# EAGLE board plyta_glowna (EAGLE 4.13)
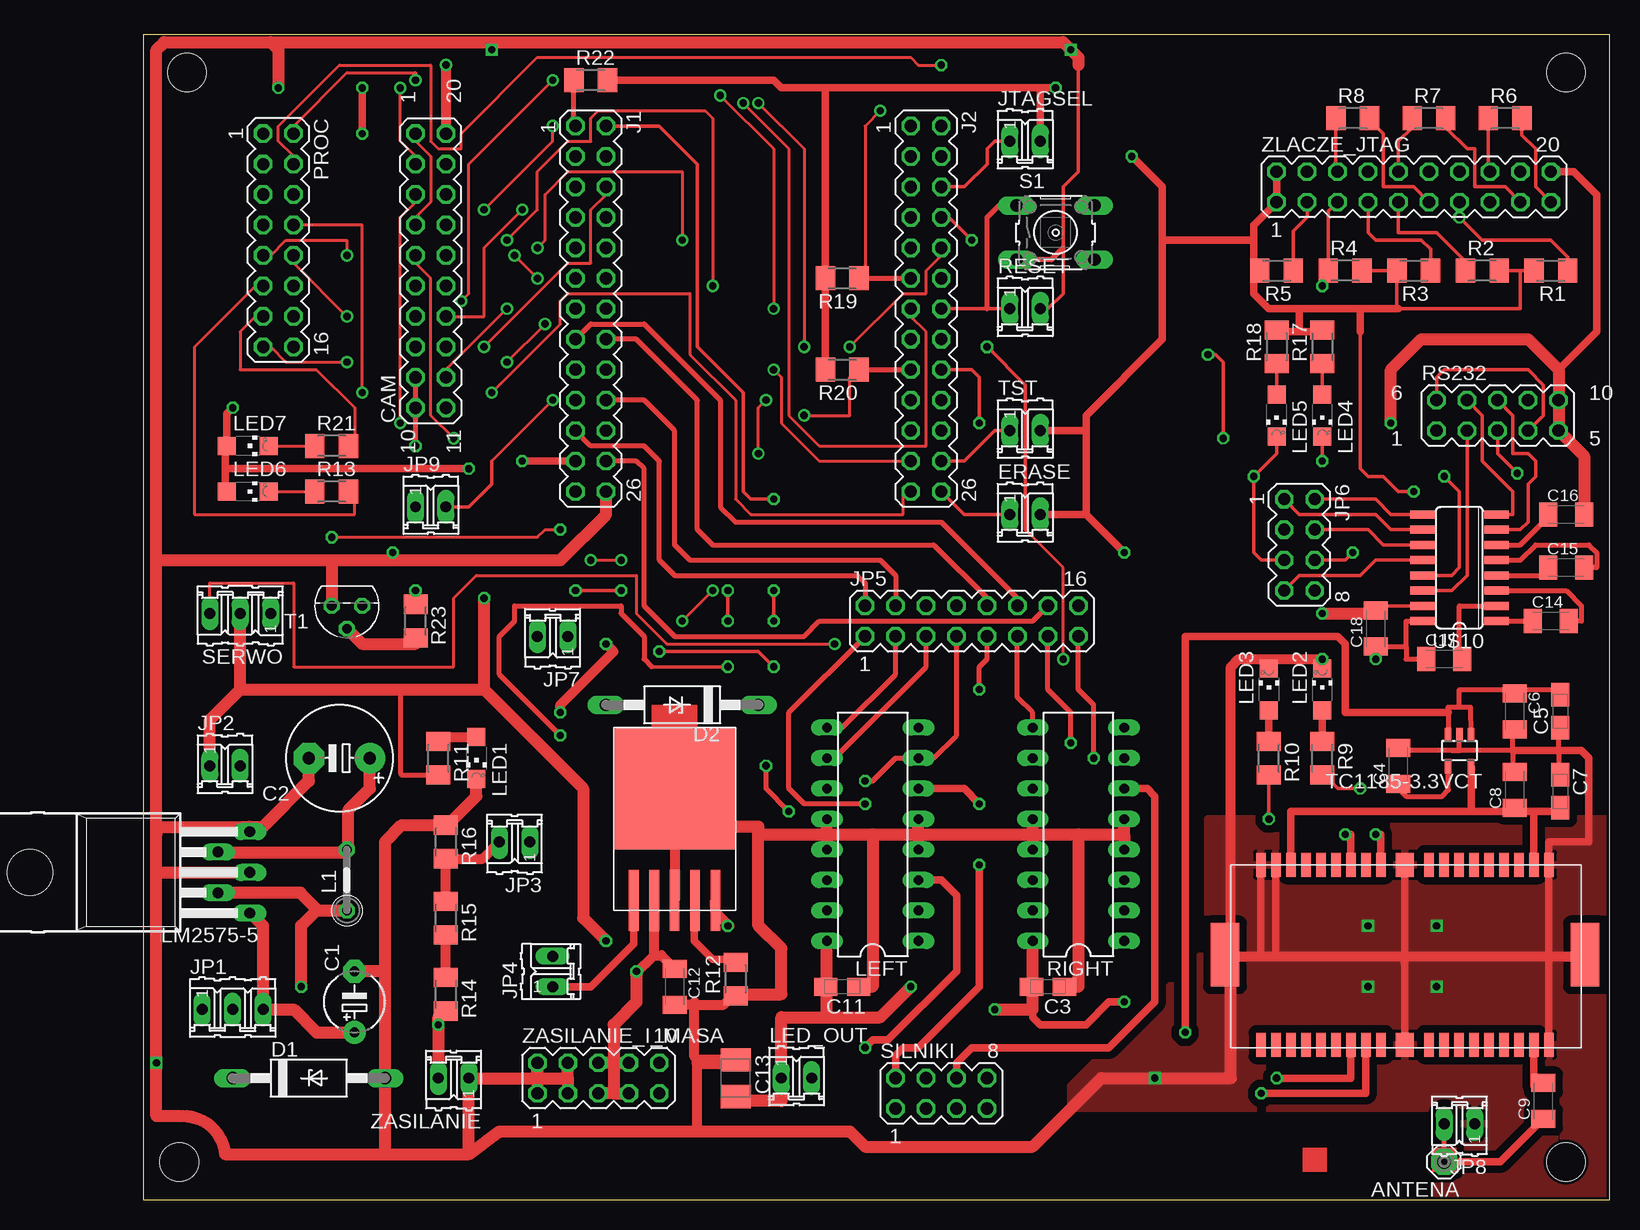
[diagram p0: board, top side]
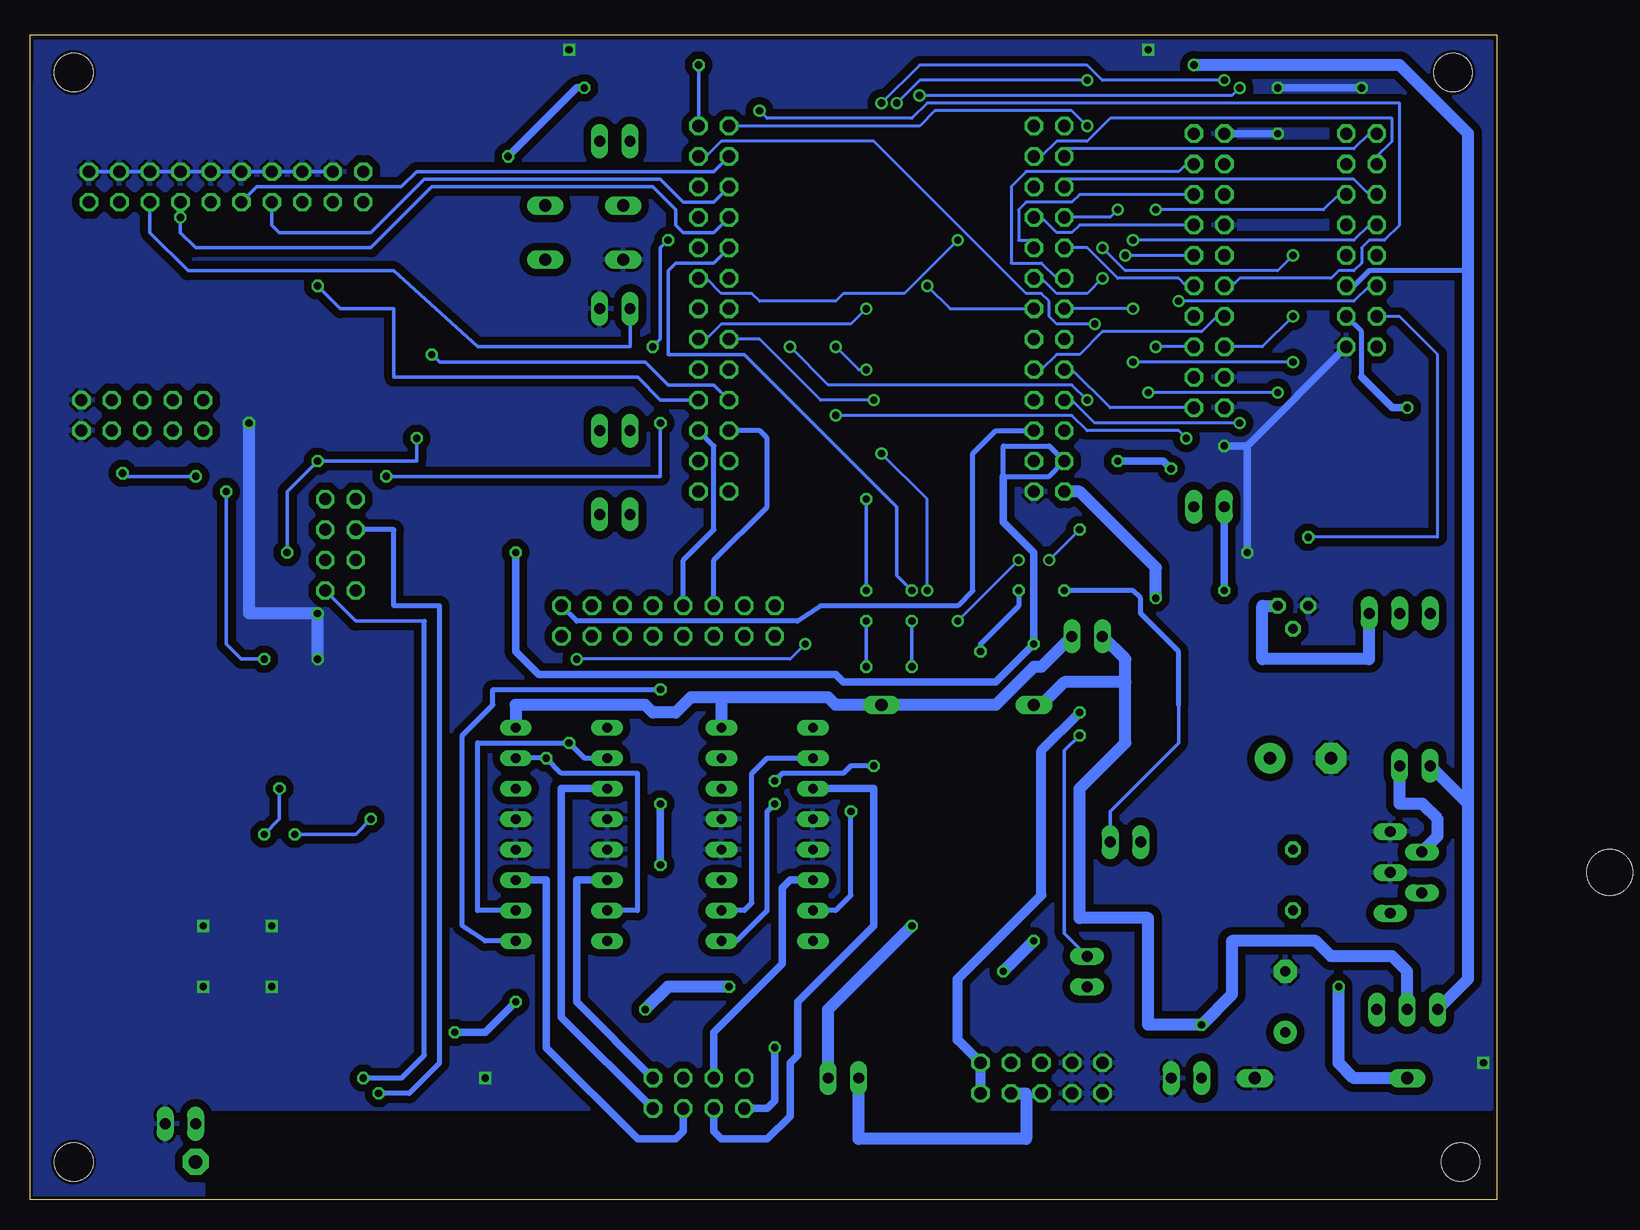
[diagram p1: board, bottom side, seen from below]

Size 122.22 x 97.15 mm. Coordinates in mm from the lower left corner, seen from the top.
Outline: 0,0 122.22,0 122.22,97.15 0,97.15 0,0
Copper layers (1*16): Top 0.035mm / dielectric 1.5mm / Bottom 0.035mm
Design rules "default": minimum track width 10mil, minimum drill 24mil, track to track 25mil, track to pad 25mil, pad to pad 10mil, via to via 10mil, smd to smd 0mil, copper to edge 10mil, drill to drill 8mil, minimum pad ring 10mil, minimum via ring 8mil, stop-mask expansion 4mil, vias tented up to drill 0mil, thermal gap 10mil
Holes 3.2 mm at 3.65,93.98 118.58,93.98 3.01,3.17 118.58,3.17

## Footprints (pad centres in the part's own frame; a part is rotated, then mirrored left to right if it is on the bottom)
SE11 = drill 1.118 pad 2.159 octagon: MP 0,0
E5-5 = drill 0.813 pad 1.905 round: + -2.54,0 | drill 0.813 pad 1.905 octagon: - 2.54,0
E5-8,5 = drill 1.016 pad 2.54 round: + -2.54,0 | drill 1.016 pad 2.54 octagon: - 2.54,0
A/3216-18R = smd 1.95 x 1.5: + 1.375,0; - -1.375,0
C1206K = smd 1.5 x 2: 1 -1.5,0; 2 1.5,0
B/3528-21R = smd 1.95 x 2.5: + 1.525,0; - -1.525,0
MA10-2V2 = drill 1.016 octagon: 1 11.43,1.27; 2 8.89,1.27; 3 6.35,1.27; 4 3.81,1.27; 5 1.27,1.27; 6 -1.27,1.27; 7 -3.81,1.27; 8 -6.35,1.27; 9 -8.89,1.27; 10 -11.43,1.27; 11 -11.43,-1.27; 12 -8.89,-1.27; 13 -6.35,-1.27; 14 -3.81,-1.27; 15 -1.27,-1.27; 16 1.27,-1.27; 17 3.81,-1.27; 18 6.35,-1.27; 19 8.89,-1.27; 20 11.43,-1.27
F126Z12 = drill 1.016 long: A 6.35,0; C -6.35,0
02P = drill 0.914 long: 1 -1.27,0; 2 1.27,0
MA13-2 = drill 1.016 octagon: 1 -15.24,-1.27; 2 -15.24,1.27; 3 -12.7,-1.27; 4 -12.7,1.27; 5 -10.16,-1.27; 6 -10.16,1.27; 7 -7.62,-1.27; 8 -7.62,1.27; 9 -5.08,-1.27; 10 -5.08,1.27; 11 -2.54,-1.27; 12 -2.54,1.27; 13 0,-1.27; 14 0,1.27; 15 2.54,-1.27; 16 2.54,1.27; 17 5.08,-1.27; 18 5.08,1.27; 19 7.62,-1.27; 20 7.62,1.27; 21 10.16,-1.27; 22 10.16,1.27; 23 12.7,-1.27; 24 12.7,1.27; 25 15.24,-1.27; 26 15.24,1.27
03P = drill 0.914 long: 1 -2.54,0; 2 0,0; 3 2.54,0
MA08-2 = drill 1.016 octagon: 1 -8.89,-1.27; 2 -8.89,1.27; 3 -6.35,-1.27; 4 -6.35,1.27; 5 -3.81,-1.27; 6 -3.81,1.27; 7 -1.27,-1.27; 8 -1.27,1.27; 9 1.27,-1.27; 10 1.27,1.27; 11 3.81,-1.27; 12 3.81,1.27; 13 6.35,-1.27; 14 6.35,1.27; 15 8.89,-1.27; 16 8.89,1.27
MA04-2 = drill 1.016 octagon: 1 -3.81,-1.27; 2 -3.81,1.27; 3 -1.27,-1.27; 4 -1.27,1.27; 5 1.27,-1.27; 6 1.27,1.27; 7 3.81,-1.27; 8 3.81,1.27
0207/5V = drill 0.813 octagon: 1 -2.54,0; 2 2.54,0
CHIPLED_1206 = smd 1.5 x 1.5: A 0,-1.75; C 0,1.75
DIL16 = drill 0.813 long: 1 -8.89,-3.81; 2 -6.35,-3.81; 3 -3.81,-3.81; 4 -1.27,-3.81; 5 1.27,-3.81; 6 3.81,-3.81; 7 6.35,-3.81; 8 8.89,-3.81; 9 8.89,3.81; 10 6.35,3.81; 11 3.81,3.81; 12 1.27,3.81; 13 -1.27,3.81; 14 -3.81,3.81; 15 -6.35,3.81; 16 -8.89,3.81
TO220-52 = drill 0.9 long: 1 -3.4,-21.1; 2 -1.7,-18.47; 3 0,-21.1; 4 1.7,-18.47; 5 3.4,-21.1 | hole 3.8: 0,-2.8
M1206 = smd 1.6 x 2: 1 -1.4,0; 2 1.4,0
MA05-2V2 = drill 1.016 octagon: 1 -5.08,-1.27; 2 -2.54,-1.27; 3 0,-1.27; 4 2.54,-1.27; 5 5.08,-1.27; 6 -5.08,1.27; 7 -2.54,1.27; 8 0,1.27; 9 2.54,1.27; 10 5.08,1.27
B3F-10XX = drill 1.016 long: 1 -3.251,2.261; 2 3.251,2.261; 3 -3.251,-2.261; 4 3.251,-2.261
TO92 = drill 0.813 octagon: 1 1.27,0; 2 0,1.905; 3 -1.27,0
SOT23-5 = smd 0.55 x 1.2: 1 -0.95,-1.3; 2 0,-1.3; 3 0.95,-1.3; 4 0.95,1.3; 5 -0.95,1.3
TO265 = smd 10.16 x 10.16: BLASZKA 0,7.62 | smd 0.813 x 5.08: P$1 -3.404,-1.702; P$2 -1.702,-1.702; P$3 0,-1.702; P$4 1.702,-1.702; P$5 3.404,-1.702
SO16 = smd 0.66 x 2.032: 1 -4.445,-3.073; 2 -3.175,-3.073; 3 -1.905,-3.073; 4 -0.635,-3.073; 5 0.635,-3.073; 6 1.905,-3.073; 7 3.175,-3.073; 8 4.445,-3.073; 9 4.445,3.073; 10 3.175,3.073; 11 1.905,3.073; 12 0.635,3.073; 13 -0.635,3.073; 14 -1.905,3.073; 15 -3.175,3.073; 16 -4.445,3.073
BTM222 = smd 0.8 x 2: P$1 -10,0; P$2 -8.75,0; P$3 -7.5,0; P$4 -6.25,0; P$5 -5,0; P$6 -3.75,0; P$7 -2.5,0; P$8 -1.25,0; P$9 0,0; P$11 4,0; P$12 5.25,0; P$13 6.5,0; P$14 7.75,0; P$15 9,0; P$16 10.25,0; P$17 11.5,0; P$18 12.75,0; P$19 14,0; P$20 14,15; P$21 12.75,15; P$22 11.5,15; P$23 10.25,15; P$24 9,15; P$25 7.75,15; P$26 6.5,15; P$27 5.25,15; P$28 4,15; P$30 0,15; P$31 -1.25,15; P$32 -2.5,15; P$33 -3.75,15; P$34 -5,15; P$35 -6.25,15; P$36 -7.5,15; P$37 -8.75,15; P$38 -10,15 | smd 1.5 x 2: P$10 2,0; P$29 2,15 | smd 2.4 x 5.3: P$390 -13,7.5; P$401 17,7.5
MA05-2 = drill 1.016 octagon: 1 -5.08,-1.27; 2 -5.08,1.27; 3 -2.54,-1.27; 4 -2.54,1.27; 5 0,-1.27; 6 0,1.27; 7 2.54,-1.27; 8 2.54,1.27; 9 5.08,-1.27; 10 5.08,1.27
MA10-2 = drill 1.016 octagon: 1 -11.43,-1.27; 2 -11.43,1.27; 3 -8.89,-1.27; 4 -8.89,1.27; 5 -6.35,-1.27; 6 -6.35,1.27; 7 -3.81,-1.27; 8 -3.81,1.27; 9 -1.27,-1.27; 10 -1.27,1.27; 11 1.27,-1.27; 12 1.27,1.27; 13 3.81,-1.27; 14 3.81,1.27; 15 6.35,-1.27; 16 6.35,1.27; 17 8.89,-1.27; 18 8.89,1.27; 19 11.43,-1.27; 20 11.43,1.27

## Placement (x,y rotation side)
ANTENA  SE11  [SE11]  108.42,3.17 180 top
C1  100uF  [E5-5]  17.62,16.5 90 top
C2  330uF  [E5-8,5]  16.34,36.83 180 top
C3  1uF  [A/3216-18R]  75.4,17.77 180 top
C4  450pF  [C1206K]  104.61,36.19 90 top
C5  1uF  [A/3216-18R]  118.1,40.74 90 top
C6  100nF  [C1206K]  114.29,40.74 270 top
C7  1uF  [A/3216-18R]  118.1,34.06 270 top
C8  100nF  [C1206K]  114.29,34.18 90 top
C9  3.3pF  [C1206K]  116.67,8.25 90 top
C11  1uF  [A/3216-18R]  58.26,17.77 180 top
C12  100nF  [C1206K]  44.29,17.77 270 top
C13  100uF  [B/3528-21R]  49.37,10.15 270 top
C14  100nF  [C1206K]  117.31,48.25 0 top
C15  100nF  [C1206K]  118.58,52.7 0 top
C16  100nF  [C1206K]  118.58,57.14 0 top
C17  100nF  [C1206K]  108.42,45.08 0 top
C18  100nF  [C1206K]  102.7,47.62 90 top
CAM  po6030  [MA10-2V2]  23.96,77.47 90 top
D1  1N5819  [F126Z12]  13.8,10.15 0 top
D2  1N5819  [F126Z12]  44.92,41.27 180 top
ERASE  [02P]  73.49,57.14 0 top
J1  [MA13-2]  37.3,74.29 270 top
J2  [MA13-2]  65.24,74.29 270 top
JP1  [03P]  7.46,15.87 0 top
JP2  [02P]  6.82,36.19 0 top
JP3  [02P]  30.95,29.84 180 top
JP4  [02P]  34.12,19.05 90 top
JP5  [MA08-2]  69.05,48.25 0 top
JP6  [MA04-2]  96.35,54.6 270 top
JP7  [02P]  34.12,46.98 180 top
JP8  [02P]  109.69,6.34 180 top
JP9  [02P]  23.96,57.78 0 top
JTAGSEL  [02P]  73.49,88.26 0 top
L1  330uH  [0207/5V]  16.98,26.66 90 top
LED1  [CHIPLED_1206]  27.77,36.83 180 top
LED2  [CHIPLED_1206]  98.26,42.54 0 top
LED3  [CHIPLED_1206]  93.81,42.54 0 top
LED4  [CHIPLED_1206]  98.26,65.4 180 top
LED5  [CHIPLED_1206]  94.45,65.4 180 top
LED6  [CHIPLED_1206]  8.72,59.05 270 top
LED7  [CHIPLED_1206]  8.72,62.86 270 top
LED_OUT  [02P]  54.45,10.15 0 top
LEFT  L293D  [DIL16]  60.8,30.48 90 top
LM2575-5  [TO220-52]  -12.23,27.3 90 top
PROC  [MA08-2]  11.27,80.01 270 top
R1  10k  [M1206]  117.31,77.47 180 top
R2  10k  [M1206]  111.59,77.47 0 top
R3  10k  [M1206]  105.88,77.47 180 top
R4  10k  [M1206]  100.16,77.47 0 top
R5  10k  [M1206]  94.45,77.47 180 top
R6  10k  [M1206]  113.5,90.17 0 top
R7  10k  [M1206]  107.15,90.17 0 top
R8  10k  [M1206]  100.8,90.17 0 top
R9  220  [M1206]  98.26,36.83 270 top
R10  220  [M1206]  93.81,36.83 270 top
R11  512  [M1206]  24.6,36.83 270 top
R12  3,6k  [M1206]  49.37,18.41 90 top
R13  220  [M1206]  15.71,59.05 0 top
R14  2k  [M1206]  25.23,17.14 270 top
R15  2k  [M1206]  25.23,23.49 270 top
R16  2k  [M1206]  25.23,29.84 270 top
R17  220  [M1206]  98.26,71.11 90 top
R18  220  [M1206]  94.45,71.11 90 top
R19  2k  [M1206]  58.26,76.83 180 top
R20  2k  [M1206]  58.26,69.21 180 top
R21  220  [M1206]  15.71,62.86 0 top
R22  100  [M1206]  37.3,93.34 0 top
R23  1k  [M1206]  22.7,48.25 270 top
RESET  [02P]  73.49,74.29 0 top
RIGHT  L293D  [DIL16]  77.94,30.48 90 top
RS232  MA05-2V2  [MA05-2V2]  112.86,65.4 0 top
S1  [B3F-10XX]  76.03,80.64 0 top
SERWO  [03P]  8.09,48.89 180 top
SILNIKI  [MA04-2]  66.51,8.88 0 top
T1  BC337  [TO92]  16.98,49.52 180 top
TC1185-3.3VCT  3.3V  [SOT23-5]  109.69,37.46 180 top
TST  [02P]  73.49,64.13 0 top
U$2  MBI1801  [TO265]  44.29,26.66 0 top
U$10  MAX3232CSE  [SO16]  109.69,52.7 90 top
U$17  BTM222  [BTM222]  107.15,27.94 180 top
ZASILANIE  [02P]  25.87,10.15 180 top
ZASILANIE_I_MASA  [MA05-2]  37.94,10.15 0 top
ZLACZE_JTAG  [MA10-2]  105.88,84.45 0 top

## Library data of the parts
ANTENA = solpad
C1-C9 C11-C18 L1 R1-R23 = rcl
CAM J1 J2 JP5 JP6 PROC RS232 SILNIKI ZASILANIE_I_MASA ZLACZE_JTAG = con-lstb
D1 D2 = diode
ERASE JP1-JP4 JP7-JP9 JTAGSEL LED_OUT RESET SERWO TST ZASILANIE = con-amp-quick
LED1-LED7 = led
LEFT RIGHT = st-microelectronics
LM2575-5 = linear
S1 = switch-omron
T1 = transistor
TC1185-3.3VCT = v-reg-micrel
U$2 = moje_elementy
U$10 = maxim-7a
U$17 = btm_222

## Nets
#RESET: J2.14 RESET.1 S1.1 ZLACZE_JTAG.15
+3V3: C17.1 C18.1 ERASE.2 J1.23 JTAGSEL.2 LED6.A LED7.A PROC.14 R1.2 R2.2 R3.2 R4.2 R5.2 R17.2 R18.2 R19.2 R20.2 R22.2 TST.2 U$10.16 ZASILANIE_I_MASA.9 ZASILANIE_I_MASA.10 ZLACZE_JTAG.1 ZLACZE_JTAG.2
+3V3_BTM: C7.+ C8.1 TC1185-3.3VCT.5 U$17.P$2 U$17.P$17
+5V: C3.+ C5.+ C6.1 C11.+ C12.1 C13.+ CAM.20 J1.25 JP1.1 JP2.1 LED_OUT.1 LEFT.16 PROC.12 R11.2 RIGHT.16 SERWO.2 TC1185-3.3VCT.1 TC1185-3.3VCT.3 U$2.P$2 ZASILANIE_I_MASA.5 ZASILANIE_I_MASA.6 ZASILANIE_I_MASA.7 ZASILANIE_I_MASA.8
AD4: J1.2 JP3.1
AD5: J1.3 PROC.1
AD6: J1.4 PROC.3
AD7: J1.5 PROC.5
ADVREF: J1.1 R22.1
BTM_RX_DATA_INPUT: JP6.8 U$17.P$26
BTM_TX_DATA_OUTPUT: JP6.3 U$17.P$27
CAM_PCLK: CAM.8 PROC.10
CATODE: LED_OUT.2 U$2.P$5
CTS_3V: JP6.2 U$10.9
DF_CS: J2.25 PROC.8
ERASE: ERASE.1 J2.26
GND: C1.- C2.- C3.- C4.2 C5.- C6.2 C7.- C8.2 C11.- C12.2 C13.- C16.2 C18.2 CAM.1 CAM.4 CAM.9 CAM.10 D1.A J1.26 JP8.1 LED1.C LED2.C LED3.C LEFT.4 LEFT.5 LEFT.12 LEFT.13 LM2575-5.3 LM2575-5.5 PROC.16 R6.1 R7.1 R8.1 R12.1 R16.1 RESET.2 RIGHT.4 RIGHT.5 RIGHT.12 RIGHT.13 RS232.5 RS232.10 S1.3 T1.1 TC1185-3.3VCT.2 U$2.P$3 U$10.15 U$17.P$1 U$17.P$10 U$17.P$18 U$17.P$19 U$17.P$29 U$17.P$38 ZASILANIE.1 ZASILANIE_I_MASA.1 ZASILANIE_I_MASA.2 ZASILANIE_I_MASA.3 ZASILANIE_I_MASA.4 ZLACZE_JTAG.4 ZLACZE_JTAG.6 ZLACZE_JTAG.8 ZLACZE_JTAG.10 ZLACZE_JTAG.12 ZLACZE_JTAG.14 ZLACZE_JTAG.16 ZLACZE_JTAG.18 ZLACZE_JTAG.20
IN1: JP5.5 LEFT.2 LEFT.10
IN2: JP5.7 LEFT.7 LEFT.15
IN3: JP5.13 RIGHT.2 RIGHT.10
IN4: JP5.15 RIGHT.7 RIGHT.15
JTAGSEL: J2.6 JTAGSEL.1
LED_EN: JP4.1 U$2.P$1
M1_1: LEFT.3 SILNIKI.1
M1_2: LEFT.6 SILNIKI.2
M2_1: LEFT.11 SILNIKI.3
M2_2: LEFT.14 SILNIKI.4
M3_1: RIGHT.3 SILNIKI.5
M3_2: RIGHT.6 SILNIKI.6
M4_1: RIGHT.11 SILNIKI.7
M4_2: RIGHT.14 SILNIKI.8
N$1: R6.2 ZLACZE_JTAG.19
N$2: R7.2 ZLACZE_JTAG.17
N$3: R8.2 ZLACZE_JTAG.11
N$4: D1.C L1.1 LM2575-5.2
N$5: R5.1 ZLACZE_JTAG.3
N$6: ANTENA.MP C9.1 JP8.2
N$7: LED2.A R9.1
N$8: LED3.A R10.1
N$9: LED1.A R11.1
N$10: LED6.C R13.1
N$11: R9.2 U$17.P$11
N$12: R10.2 U$17.P$13
N$13: LED7.C R21.1
N$14: C9.2 U$17.P$37
N$15: D2.C JP7.1 LEFT.8 RIGHT.8
N$16: JP9.1 R23.1
N$20: R12.2 U$2.P$4
N$22: C1.+ JP1.3 LM2575-5.1
N$23: C2.+ JP2.2 L1.2 LM2575-5.4
N$24: R14.1 R15.2
N$25: C14.2 U$10.3
N$26: C4.1 TC1185-3.3VCT.4
N$27: C14.1 U$10.1
N$28: C15.2 U$10.5
N$29: C15.1 U$10.4
N$30: C16.1 U$10.6
N$31: C17.2 U$10.2
N$32: LED4.A R17.1
N$33: LED5.A R18.1
N$34: R23.2 T1.2
N$36: SERWO.1 T1.3
N$37: RS232.4 RS232.6
PA0: J2.8 SERWO.3
PA1: J2.9 JP4.2
PA2: J2.10 JP9.2
PA3: CAM.6 J2.11 R19.1
PA4: CAM.5 J2.17 R20.1
PA5: J2.18 JP6.5 LED5.C
PA6: J2.19 JP6.6 LED4.C
PA7: J2.21 JP5.6
PA8: J2.22 JP5.8
PA9: J1.24 JP5.14
PA10: J1.22 JP5.16
PA11: J1.21 JP5.2
PA12: J1.20 JP5.4
PA13: J1.16 JP5.10
PA14: J1.15 JP5.12
PA15: J1.14 PROC.7
PA16: CAM.12 J1.13
PA17: CAM.13 J1.6
PA18: CAM.14 J1.7
PA19: CAM.15 J1.9
PA20: CAM.16 J1.12
PA21: CAM.17 J1.8
PA22: CAM.18 J1.10
PA23: CAM.19 J1.11
PA24: CAM.11 J1.17
PA25: CAM.7 J1.18
PA26: CAM.3 J1.19
PA27: CAM.2 J2.16
PA28: J2.15 PROC.13 R21.2
PA29: J2.13 PROC.11 R13.2
PA30: J2.12 PROC.9
PA31: J2.4 PROC.15
PC_CTS: RS232.7 U$10.8
PC_RTS: RS232.8 U$10.7
PC_RX: RS232.3 U$10.13
PC_TX: RS232.2 U$10.14
PWM1: JP5.1 LEFT.1
PWM2: JP5.3 LEFT.9
PWM3: JP5.9 RIGHT.1
PWM4: JP5.11 RIGHT.9
RTS_3V: JP6.1 U$10.10
RXD_3V: JP6.7 U$10.12
TCK: J2.3 R2.1 ZLACZE_JTAG.9
TDI: J2.20 R4.1 ZLACZE_JTAG.5
TDO: J2.7 R1.1 ZLACZE_JTAG.13
TMS: J2.5 R3.1 ZLACZE_JTAG.7
TST: J2.24 TST.1
TXD_3V: JP6.4 U$10.11
UDP_PUP: J2.23 PROC.2
USBDN: J2.2 PROC.4
USBDP: J2.1 PROC.6
VBATT*0.33: JP3.2 R15.1 R16.2
VCC: D2.A JP1.2 JP7.2 R14.2 ZASILANIE.2

## Tracks (layer width: path | path; a pad name or v marks a point on that pad's centre or on a via)
#RESET
  Top 0.305: J2.14 70.32,74.29 RESET.1
  Top 0.406: S1.1 71.31,82.9 70.32,81.91 70.32,74.29
  Bottom 0.305: ZLACZE_JTAG.15 112.23,80.64 109.05,77.47 91.91,77.47 84.92,71.11 72.22,71.11 RESET.1
+3V3  (via drill 0.6)
  Top 0.254: 6.82,62.23 7.46,62.23 LED7.A | 6.82,59.68 7.46,59.68 LED6.A
  Top 0.305: v105.88,59.05 104.61,59.05 103.34,60.32 102.07,60.32 101.44,60.95 101.44,72.39 | 92.55,78.1 93.18,77.47 R5.2 92.55,77.47 | R3.2 104.61,77.47 | R3.2 R4.2 | R3.2 104.48,74.42 104.61,74.29 114.77,74.29 114.77,77.47 | 112.86,77.47 R2.2 114.77,77.47 | 114.77,77.47 R1.2
  Top 0.406: 105.24,46.12 C18.1 v102.7,45.08 | 105.24,46.12 105.24,48.25 U$10.16 107.15,48.25 | 105.24,46.12 105.24,45.08 C17.1 | 94.32,72.39 R18.2 94.58,72.39
  Top 0.61: v76.03,92.7 74.77,92.7 | 74.77,92.7 56.99,92.7 | 56.99,92.7 53.18,92.7 52.54,93.34 R22.2 38.57,93.34 | R20.2 56.86,76.7 56.99,76.83 R19.2 56.86,92.58 56.99,92.7 | 74.77,92.7 JTAGSEL.2 | v81.75,53.97 78.58,57.14 | 78.58,57.14 ERASE.2 | 78.58,57.14 78.58,64.13 | 78.58,64.13 TST.2 | 92.55,77.47 92.55,75.56 93.81,74.29 96.35,74.29 | 92.55,80.01 92.55,78.1 | 92.55,80.01 92.55,81.28 ZLACZE_JTAG.1 ZLACZE_JTAG.2 | 96.35,72.39 94.58,72.39 | 96.35,72.39 98.26,72.39 R17.2 98.39,72.39 | 96.35,74.29 101.44,74.29 | 101.44,74.29 104.61,74.29 | 101.44,74.29 101.44,72.39 | 96.35,74.29 96.35,72.39 | J1.23 v31.59,61.59 | v27.14,60.95 6.82,60.95 | LED6.A 6.82,59.05 6.82,60.95 | 6.82,60.95 6.82,62.86 LED7.A 6.97,65.56 v7.46,66.03 | 84.92,80.01 92.55,80.01 | v82.38,86.99 84.92,84.45 84.92,80.01 | 78.58,64.13 78.58,65.4 84.92,71.75 84.92,80.01
  Top 0.813: v34.76,40.63 34.76,41.27 39.21,45.71 v38.57,46.35
  Bottom 0.305: v105.88,59.05 105.88,46.35 104.61,45.08 v102.7,45.08
  Bottom 0.406: 11.27,68.58 11.27,72.39 PROC.14 | 37.3,60.32 J1.23 37.3,62.86 41.11,62.86 41.11,60.32 37.3,60.32
  Bottom 0.61: v76.03,92.7 76.67,92.7 v82.38,86.99 | v81.75,53.97 81.75,45.71 79.84,43.81 55.08,43.81 54.45,43.17 41.75,43.17 v38.57,46.35 38.57,53.97 41.11,56.51 41.11,60.32 | v31.59,61.59 27.77,61.59 v27.14,60.95 | v7.46,66.03 8.72,66.03 11.27,68.58
  Bottom 0.813: ZASILANIE_I_MASA.9 ZASILANIE_I_MASA.10 44.92,13.33 44.92,18.41 37.94,25.4 37.94,37.46 v34.76,40.63
+3V3_BTM
  Top 0.406: 110.66,36.09 110.64,36.1 TC1185-3.3VCT.5 | 114.13,32.38 114.13,33.17 C8.1 114.29,32.53 114.13,32.38
  Top 0.61: U$17.P$17 95.65,32.38 110.96,32.38 | 110.96,32.38 114.13,32.38 | 114.13,32.38 114.77,32.38 | 110.66,36.09 110.66,32.38 110.96,32.38 | 114.13,32.38 114.29,32.38 C8.1 | 115.9,32.38 U$17.P$2 | 114.13,32.38 115.9,32.38 | C7.+ 118.1,32.38 115.9,32.38
+5V  (via drill 0.6, 0.61)
  Top 0.406: TC1185-3.3VCT.3 108.75,38.76 108.75,40.63 108.75,41.09 109.69,41.09 | TC1185-3.3VCT.1 110.63,38.76 110.6,41.09 109.69,41.09 | C5.+ 117.67,42.54 114.13,42.54 114.13,41.75 C6.1 113.98,42.54 109.69,42.54 109.69,41.09 | R11.2 21.55,35.42 21.43,35.55 21.43,42.54
  Top 0.61: v86.83,13.96 86.83,46.98 99.53,46.98 100.16,46.35 100.16,40.63 108.75,40.63 | v81.75,16.5 80.48,16.5 78.58,14.6 74.77,14.6 74.13,15.23 74.13,15.87
  Top 0.813: 41.11,18.92 40.98,18.79 | v41.11,19.05 41.11,18.92 | 42.58,20.39 U$2.P$2 | 41.11,18.92 42.58,20.39 | 44.31,19.27 44.41,19.17 | 44.31,19.27 C12.1 | 42.58,20.39 43.19,20.39 44.31,19.27 | v25.23,94.61 CAM.20
  Top 1.016: 56.99,17.77 LEFT.16 | 74.13,17.77 RIGHT.16 | 56.99,17.77 C11.+ | 56.99,15.23 56.99,17.77 | 56.99,15.23 53.18,15.23 LED_OUT.1 53.18,8.25 49.37,8.25 C13.+ | 8.09,42.54 5.55,40 JP2.1 | 8.09,42.54 21.43,42.54 28.41,42.54 | 28.41,42.54 36.67,34.28 36.67,23.49 v38.57,21.59 | v41.11,19.05 41.11,16.5 39.21,14.6 39.21,11.43 | 39.21,11.43 ZASILANIE_I_MASA.6 | 39.21,11.43 ZASILANIE_I_MASA.8 | 39.21,8.88 ZASILANIE_I_MASA.7 | 39.21,11.43 39.21,8.88 | 39.21,8.88 ZASILANIE_I_MASA.5 | 56.99,15.23 61.43,15.23 v63.97,17.77 | v70.95,15.87 74.13,15.87 74.13,17.77 | 74.13,17.77 C3.+ | 28.41,42.54 v28.41,50.16 | 8.09,42.54 SERWO.2
  Bottom 0.406: 2.38,77.47 10.63,77.47 11.9,76.2 PROC.12
  Bottom 0.61: v86.83,13.96 84.29,13.96 v81.75,16.5
  Bottom 1.016: JP1.1 2.38,18.41 2.38,33.02 | 2.38,33.02 JP2.1 | v38.57,21.59 v41.11,19.05 | ZASILANIE_I_MASA.7 39.21,8.88 39.21,5.07 53.18,5.07 LED_OUT.1 | v63.97,17.77 69.05,17.77 v70.95,15.87 | J1.25 34.76,59.05 28.41,52.7 v28.41,50.16 | 2.38,33.02 2.38,77.47 2.38,88.9 8.09,94.61 v25.23,94.61
AD4  (via drill 0.6)
  Top 0.305: v36.03,50.79 v39.84,50.79 | v43.02,45.71 51.27,45.71 v52.54,44.45 | v52.54,48.25 v52.54,50.79 | v52.54,58.41 50.64,58.41 50,59.05 50,67.31 46.19,71.11 46.19,86.36 43.02,89.53 J1.2
  Bottom 0.305: JP3.1 32.22,32.38 26.5,38.09 26.5,41.27 | v52.54,44.45 v52.54,48.25 | v52.54,50.79 v52.54,58.41
  Bottom 0.406: 26.5,41.27 26.5,45.71 29.68,48.89 29.68,50.16 30.32,50.79 v36.03,50.79 | v39.84,50.79 39.84,49.52 43.02,46.35 v43.02,45.71
AD5
  Bottom 0.254: PROC.1 10.63,88.9 11.9,87.62 36.03,87.62 J1.3
AD6
  Bottom 0.254: PROC.3 9.99,86.99 8.72,88.26 8.72,90.17 32.22,90.17 34.12,88.26 36.67,88.26 37.94,86.99 J1.4
AD7
  Bottom 0.254: PROC.5 10.63,83.82 11.9,85.09 36.03,85.09 J1.5
ADVREF
  Top 0.406: R22.1 35.9,89.66 J1.1
BTM_RX_DATA_INPUT  (via drill 0.6)
  Top 0.61: U$17.P$26 100.65,10.15 v94.45,10.15
  Bottom 0.305: JP6.8 95.08,48.25 89.37,48.25
  Bottom 0.406: 89.37,48.25 89.37,12.06 91.27,10.15 v94.45,10.15
BTM_TX_DATA_OUTPUT  (via drill 0.6)
  Top 0.61: U$17.P$27 101.9,8.88 v93.18,8.88
  Bottom 0.406: JP6.3 91.91,55.88 91.91,49.52 88.1,49.52 88.1,11.43 90.64,8.88 v93.18,8.88
CAM_PCLK  (via drill 0.61)
  Top 0.254: v16.98,73.66 12.54,78.1 PROC.10
  Bottom 0.254: v16.98,73.66 19.52,71.11 CAM.8
CATODE  (via drill 0.6)
  Top 0.813: 48.83,22.86 48.86,22.83 | v48.73,22.86 48.83,22.86 | U$2.P$5 47.69,24 48.83,22.86
  Bottom 1.016: v48.73,22.86 55.72,15.87 LED_OUT.2
CTS_3V
  Top 0.305: JP6.2 102.7,58.41 103.97,57.14 U$10.9
DF_CS  (via drill 0.61)
  Top 0.254: v18.25,67.31 18.25,81.28 PROC.8 | v29.04,67.31 34.76,73.02 34.76,74.93 35.4,75.56 45.55,75.56 45.55,70.48 49.37,66.67 49.37,58.41 50.64,57.14 63.34,57.14 63.34,59.05 J2.25
  Bottom 0.254: v18.25,67.31 v29.04,67.31
ERASE
  Top 0.305: ERASE.1 68.41,57.14 J2.26
GND  (via drill 0.6)
  Top 0.254: CAM.4 22.7,81.91 23.96,83.18 23.96,86.99 22.7,88.26 CAM.1
  Top 0.305: C18.2 102.94,49.12 103.34,49.52 U$10.15 | R8.1 99.4,85.85 ZLACZE_JTAG.6 | R7.1 105.75,89.4 104.61,88.26 ZLACZE_JTAG.10 | R6.1 112.1,85.85 ZLACZE_JTAG.16 | RESET.2 75.4,74.29 76.67,75.56 76.67,79.37 76.67,84.45 77.94,85.72 77.94,94.61
  Top 0.406: TC1185-3.3VCT.2 109.69,37.46 109.05,37.46 | 114.13,37.46 109.05,37.46 | C6.2 114.16,38.73 114.13,38.73 114.13,37.46 | C8.2 114.16,36.19 114.13,36.19 114.13,37.46 | 117.94,37.46 117.94,38.73 118.09,38.73 C5.- 117.94,38.57 117.94,37.46 | C7.- 117.97,36.19 117.94,36.19 117.94,37.46 | C4.2 104.61,38.09 105.24,37.46 109.05,37.46 | LED2.C 98.26,43.81 | v22.7,62.86 CAM.10 CAM.9 | S1.3 75.68,78.38 76.67,79.37
  Top 0.61: 94.36,20.41 94.45,20.31 94.4,20.31 U$17.P$18 | 93.11,20.38 93.18,20.31 93.15,20.31 U$17.P$19 | 117.31,20.31 117.11,20.12 | 105.11,19.68 105.11,20.18 105.24,20.31 105.15,20.31 | 117.31,20.31 117.11,20.52 | 114.13,37.46 117.94,37.46 119.85,37.46 120.48,36.83 120.48,29.84 117.15,29.84 U$17.P$1 117.15,20.31 | 105.15,20.31 U$17.P$10 | 105.15,20.31 U$17.P$29 | 117.15,20.31 U$17.P$38 | 117.31,20.31 117.15,20.31 | v18.25,92.7 v18.25,88.9 | 117.94,69.21 121.12,72.39 121.12,83.82 119.21,85.72 ZLACZE_JTAG.20 | 20.79,53.34 v20.79,53.97
  Top 0.813: R12.1 49.37,17.27 48.37,16.27 45.94,16.27 | 45.94,16.27 C12.2 | 46.32,5.71 46.32,5.84 46.19,5.96 46.19,11.43 | C13.- 46.19,11.68 45.94,11.93 45.94,16.27 | 45.94,16.27 45.94,16.5 | 90.64,20.31 93.18,20.31 94.45,20.31 105.24,20.31 117.31,20.31 119.21,20.31 | LED2.C v98.26,45.08 93.81,45.08 | 93.81,45.08 LED3.C | 93.81,45.08 91.27,45.08 90.64,44.45 90.64,19.68 | 44.29,31.11 U$2.P$3
  Top 1.016: 20.16,3.8 27.14,3.8 | 27.14,3.8 ZASILANIE.1 32.86,10.15 | 20.16,3.8 D1.A 20.16,19.05 | 20.16,19.05 C1.- | 8.87,31.11 LM2575-5.5 | 8.87,31.11 1.1,31.11 1.1,30.48 | 9.36,27.3 LM2575-5.3 1.1,27.3 | 1.1,27.3 1.1,30.48 | 1.1,27.3 1.1,6.98 3.01,6.98 arc-90 6.82,3.8 20.16,3.8 | 8.87,31.11 9.99,31.11 13.8,34.92 C2.- | LED1.C 27.77,33.65 25.23,31.11 R16.1 21.55,31.24 20.16,29.84 20.16,19.05 | ZASILANIE_I_MASA.1 ZASILANIE_I_MASA.2 32.86,10.15 | 32.86,10.15 35.4,10.15 | 35.4,10.15 ZASILANIE_I_MASA.3 | 35.4,10.15 ZASILANIE_I_MASA.4 | C13.- 49.37,11.43 46.19,11.43 | R12.1 49.37,17.14 53.18,17.14 53.18,20.95 51.27,22.86 51.27,31.11 | 51.27,31.11 44.29,31.11 | 51.27,31.11 51.27,30.48 56.99,30.48 | 56.99,30.48 LEFT.12 | 56.99,30.48 LEFT.13 | 64.61,30.48 LEFT.4 | 56.99,30.48 60.8,30.48 | 60.8,30.48 64.61,30.48 | 64.61,30.48 LEFT.5 | 74.13,30.48 RIGHT.12 | 64.61,30.48 74.13,30.48 | 74.13,30.48 RIGHT.13 | 81.75,30.48 RIGHT.5 | 74.13,30.48 77.94,30.48 | 77.94,30.48 81.75,30.48 | 81.75,30.48 RIGHT.4 | C11.- 60.8,17.77 60.8,30.48 | C3.- 77.94,17.77 77.94,30.48 | 27.14,3.8 29.68,5.71 46.32,5.71 58.89,5.71 60.16,4.44 74.13,4.44 79.84,10.15 v84.29,10.15 90.64,10.15 90.64,19.68 90.64,20.31 | 1.1,30.48 1.1,53.34 | J1.26 38.57,57.14 34.76,53.34 20.79,53.34 15.71,53.34 | 1.1,53.34 15.71,53.34 | 1.1,53.34 1.1,95.88 1.74,96.52 | 119.85,57.14 C16.2 120.08,61.99 RS232.5 RS232.10 117.94,69.21 115.41,71.75 106.52,71.75 103.97,69.21 v103.97,64.77 | C18.2 102.7,48.89 v98.26,48.89 | 15.71,53.34 T1.1 | 77.94,94.61 77.94,95.25 v77.3,95.88 76.67,96.52 1.74,96.52 | v11.27,92.7 11.27,95.88 10.63,96.52 1.74,96.52
  Bottom 0.305: ZLACZE_JTAG.4 ZLACZE_JTAG.6 ZLACZE_JTAG.8 ZLACZE_JTAG.10 ZLACZE_JTAG.12 ZLACZE_JTAG.14 ZLACZE_JTAG.16 ZLACZE_JTAG.18 ZLACZE_JTAG.20
  Bottom 0.61: v11.27,92.7 v18.25,92.7 | v18.25,88.9 CAM.1 | v20.79,53.97 20.79,62.86 | 20.79,62.86 v22.7,62.86 | 20.79,62.86 PROC.16
  Bottom 1.016: v98.26,45.08 v98.26,48.89 103.97,48.89 v103.97,64.77
  other vias: 29.04,95.88 1.1,11.43 102.07,22.86 107.78,22.86 102.07,17.77 107.78,17.77
  pour Top: 88.73,31.74 88.73,20.95 77.3,9.52 77.3,7.62 107.78,7.62 107.78,-0.01 122.39,-0.01 122.39,31.74
  pour Bottom: 0.47,96.52 121.75,96.52 122.39,-0.01 107.78,-0.01 107.78,7.62 0.47,7.62
IN1
  Top 0.406: LEFT.10 57.62,36.83 65.24,44.45 JP5.5
  Bottom 0.406: LEFT.2 62.7,24.12 62.07,24.76 62.07,35.55 60.8,36.83 LEFT.10
IN2  (via drill 0.6)
  Top 0.406: v53.81,32.38 51.91,34.28 v51.91,36.19 | v60.16,34.92 60.8,34.92 62.7,36.83 LEFT.7 65.88,36.83 67.78,38.73 JP5.7
  Bottom 0.406: LEFT.15 55.08,24.12 53.81,25.4 v53.81,32.38 | v51.91,36.19 53.81,36.19 54.45,35.55 59.53,35.55 v60.16,34.92
IN3  (via drill 0.6)
  Top 0.406: v77.3,38.09 77.3,40.63 75.4,42.54 JP5.13
  Bottom 0.406: RIGHT.2 84.92,24.12 84.92,38.09 v77.3,38.09 76.03,36.83 RIGHT.10
IN4  (via drill 0.6)
  Top 0.406: v79.21,36.83 79.21,41.27 77.94,42.54 JP5.15
  Bottom 0.406: RIGHT.15 71.59,24.12 71.59,35.55 77.94,35.55 v79.21,36.83 RIGHT.7
JTAGSEL
  Top 0.305: JTAGSEL.1 70.95,88.26 70.32,87.62 70.32,86.36 68.41,84.45 J2.6
LED_EN
  Top 0.61: U$2.P$1 40.88,21.36 37.3,17.77 JP4.1
M1_1  (via drill 0.6)
  Top 0.61: v60.16,12.7 60.8,13.33 62.07,13.33 67.78,19.05 67.78,25.4 66.51,26.66 LEFT.3
  Bottom 0.61: SILNIKI.1 60.8,7.62 60.16,8.25 v60.16,12.7
M1_2  (via drill 0.6)
  Top 0.61: SILNIKI.2 62.7,12.06 63.34,12.7 64.61,12.7 69.69,17.77 v69.69,27.94 | v69.69,33.02 68.41,34.28 LEFT.6
  Bottom 0.61: v69.69,27.94 v69.69,33.02
M2_1
  Bottom 0.61: SILNIKI.3 65.24,5.71 64.61,5.07 60.8,5.07 58.89,6.98 58.89,11.43 58.26,12.06 58.26,16.5 51.91,22.86 51.91,34.28 LEFT.11
M2_2
  Bottom 0.61: SILNIKI.4 65.24,13.96 59.53,19.68 59.53,26.03 58.89,26.66 LEFT.14
M3_1
  Bottom 0.61: SILNIKI.5 67.78,5.71 68.41,5.07 71.59,5.07 79.21,12.7 79.21,26.66 RIGHT.3
M3_2
  Top 0.61: SILNIKI.6 67.78,11.43 69.05,12.7 80.48,12.7 84.29,16.5 84.29,33.65 83.66,34.28 RIGHT.6
M4_1
  Bottom 0.61: SILNIKI.7 77.94,15.23 77.94,34.28 RIGHT.11
M4_2
  Bottom 0.61: SILNIKI.8 76.67,16.5 76.67,26.66 RIGHT.14
N$1
  Top 0.305: R6.2 114.9,88.77 116.04,87.62 116.04,84.45 ZLACZE_JTAG.19
N$2
  Top 0.305: R7.2 108.55,89.4 110.33,87.62 110.96,87.62 110.96,84.45 113.5,84.45 ZLACZE_JTAG.17
N$3
  Top 0.305: R8.2 102.2,90.04 103.34,88.9 103.34,84.45 105.88,84.45 ZLACZE_JTAG.11
N$4  (via drill 0.6)
  Top 1.016: LM2575-5.2 13.09,25.6 14.5,24.19 | 14.5,24.19 14.57,24.12 L1.1 | v13.17,17.77 13.17,22.86 14.5,24.19
  Bottom 1.016: D1.C 11.9,10.15 13.17,11.43 v13.17,17.77
N$5
  Top 0.305: R5.1 95.85,80.77 96.99,81.91 ZLACZE_JTAG.3
N$6
  Top 0.406: ANTENA.MP JP8.2
  Top 0.61: C9.1 113.09,3.17 ANTENA.MP
N$7
  Top 0.61: R9.1 LED2.A
N$8
  Top 0.61: R10.1 LED3.A
N$9
  Top 0.813: R11.1 24.6,38.09 25.08,38.58 LED1.A
N$10
  Top 0.254: LED6.C R13.1
N$11  (via drill 0.6)
  Top 0.305: R9.2 98.26,35.55 99.53,34.28 v101.44,34.28
  Top 0.61: U$17.P$11 103.15,30.48 v102.7,30.48
  Bottom 0.305: v102.7,30.48 101.44,31.74 v101.44,34.28
N$12  (via drill 0.6)
  Top 0.305: 93.81,35.55 R10.2 v93.81,31.74
  Top 0.61: U$17.P$13 100.65,30.48 v100.16,30.48
  Bottom 0.305: v100.16,30.48 95.08,30.48 v93.81,31.74
N$13
  Top 0.254: LED7.C R21.1
N$14
  Top 0.61: 116.04,10.15 116.67,10.15 C9.2 116.67,9.52 115.9,9.52 U$17.P$37
N$15
  Bottom 1.016: 64.61,41.91 55.72,41.91 55.08,41.27 D2.C 41.75,41.27 38.57,44.45 37.94,44.45 JP7.1 | 64.61,41.91 LEFT.8 | RIGHT.8 81.75,41.27 70.95,41.27 70.32,40.63 68.41,40.63 67.14,41.91 64.61,41.91
N$16  (via drill 0.6)
  Top 0.61: R23.1 v22.7,50.79
  Bottom 0.61: v22.7,50.79 JP9.1
N$20
  Top 0.61: U$2.P$4 45.94,24.96 45.94,21.59 47.46,20.06 49.49,20.06 49.49,19.94 R12.2
N$22
  Top 1.016: C1.+ 14.44,13.96 12.54,15.87 JP1.3 9.99,22.86 8.87,23.98 | 8.87,23.98 8.72,24.12 | 8.87,23.98 LM2575-5.1
N$23
  Top 1.016: LM2575-5.4 6.24,28.95 16.6,28.95 16.98,29.33 | 16.98,29.33 17.11,29.46 17.11,32.51 18.89,34.28 C2.+ | 16.98,29.33 L1.2
  Bottom 1.016: LM2575-5.4 4.92,30.33 4.92,31.74 6.19,33.02 8.09,33.02 JP2.2
N$24
  Top 0.813: 25.23,18.41 R14.1 R15.2
N$25
  Top 0.406: U$10.3 118.58,50.79 119.85,49.52 119.85,48.25 C14.2 118.58,48.25
N$26
  Top 0.406: C4.1 104.61,34.28 105.24,33.65 108.27,33.65 108.78,34.16 108.78,35.96 108.72,36.01 108.74,36.03 TC1185-3.3VCT.4
N$27
  Top 0.406: 116.04,48.25 C14.1 U$10.1
N$28
  Top 0.406: U$10.5 114.77,53.34 116.04,54.6 120.48,54.6 121.12,53.97 121.12,52.7 C15.2 119.85,52.7
N$29
  Top 0.406: C15.1 117.31,52.7 116.67,52.06 U$10.4
N$30
  Top 0.406: C16.1 117.08,56.91 114.77,54.6 U$10.6
N$31
  Top 0.406: 113.5,49.52 U$10.2 109.69,49.52 109.69,45.08 C17.2
N$32
  Top 0.305: 98.26,69.84 R17.1 LED4.A
N$33
  Top 0.305: 94.45,69.84 R18.1 LED5.A
N$34
  Top 0.254: R23.2 22.06,46.98
  Top 1.016: R23.2 22.7,46.35 18.25,46.35 T1.2
N$36
  Bottom 1.016: SERWO.1 10.63,45.08 19.52,45.08 19.52,49.52 T1.3
N$37
  Top 0.305: 112.86,69.21 108.42,69.21 107.78,68.58 RS232.6 | 112.86,69.21 113.5,69.21 | RS232.4 116.67,65.4 116.67,67.94 115.41,69.21 112.86,69.21
PA0  (via drill 0.6, 0.61)
  Top 0.254: v57.62,46.35 43.65,46.35 41.11,48.89 41.11,52.06 27.77,52.06 25.87,50.16 25.87,44.45 12.54,44.45 12.54,51.43 5.55,51.43 SERWO.3 | v76.67,45.08 76.67,52.7 73.49,55.88 | 67.14,81.91 J2.8
  Top 0.305: v69.05,80.01 67.14,81.91 | v70.32,71.11 73.49,67.94 73.49,55.88
  Bottom 0.254: v57.62,46.35 58.89,45.08 v76.67,45.08
  Bottom 0.305: v69.05,80.01 69.69,79.37 69.69,71.75 v70.32,71.11
PA1  (via drill 0.6)
  Top 0.305: 42.38,44.45 v48.73,44.45 | v48.73,48.25 v48.73,50.79
  Top 0.406: v34.76,38.73 29.68,43.81 29.68,46.98 30.95,48.25 30.95,49.52 39.84,49.52 39.84,48.89 41.75,46.98 41.75,45.08 42.38,44.45
  Bottom 0.305: JP4.2 36.03,22.22 36.03,37.46 v34.76,38.73 | v48.73,44.45 v48.73,48.25 | J2.9 65.24,78.1 68.41,78.1 69.05,77.47 69.05,70.48 62.7,70.48 50,57.78 50,52.06 v48.73,50.79
PA2  (via drill 0.61)
  Top 0.254: 29.04,61.59 v34.12,66.67 | v58.89,71.11 63.34,75.56 65.24,75.56 65.24,77.47 66.51,78.73 J2.10
  Top 0.305: JP9.2 27.14,57.78 29.04,59.68 29.04,61.59
  Bottom 0.254: v34.12,66.67 35.4,67.94 55.72,67.94 v58.89,71.11
PA3  (via drill 0.61)
  Top 0.254: v61.43,90.8 60.16,89.53 60.16,77.47 R19.1
  Top 0.406: R19.1 J2.11
  Bottom 0.254: v61.43,90.8 60.8,90.17 48.73,90.17 47.46,91.44 8.09,91.44 8.09,81.28 9.36,80.01 10.63,80.01 11.27,79.37 11.27,78.1 11.9,77.47 13.17,77.47 13.8,76.83 21.43,76.83 22.06,76.2 CAM.6
PA4  (via drill 0.61)
  Top 0.254: v25.87,63.49 23.96,65.4 23.96,76.83 22.7,78.1 CAM.5 | v55.08,65.4 58.89,65.4 58.89,68.58 R20.1
  Top 0.406: R20.1 J2.17
  Bottom 0.254: v25.87,63.49 26.5,64.13 34.12,64.13 35.4,65.4 v55.08,65.4
PA5  (via drill 0.6)
  Top 0.305: JP6.5 93.18,53.34 92.55,53.97 v92.55,60.32 94.45,62.23 LED5.C 94.45,64.13 | v69.69,64.77 69.69,68.58 69.05,69.21 J2.18
  Bottom 0.305: v92.55,60.32 69.69,60.32 v69.69,64.77
PA6  (via drill 0.6)
  Top 0.305: JP6.6 100.16,53.34 v100.8,53.97 | v98.26,61.59 LED4.C | v88.73,70.48 89.37,70.48 90,69.84 v90,63.49
  Bottom 0.305: v100.8,53.97 100.8,59.05 v98.26,61.59 90,61.59 v90,63.49 | J2.19 65.24,67.94 69.05,67.94 70.95,69.84 88.1,69.84 v88.73,70.48
PA7
  Bottom 0.406: JP5.6 65.24,53.34 60.8,57.78 60.8,63.49 61.43,64.13 J2.21
PA8
  Bottom 0.406: JP5.8 67.78,53.34 65.24,55.88 65.24,62.86 J2.22
PA9
  Top 0.406: JP5.14 74.13,48.25 56.35,48.25 55.08,46.98 44.29,46.98 41.75,49.52 41.75,60.95 41.11,61.59 J1.24
PA10
  Bottom 0.406: JP5.16 76.67,48.25 58.26,48.25 56.35,49.52 44.92,49.52 43.65,50.79 43.65,62.23 41.75,64.13 J1.22
PA11
  Top 0.406: JP5.2 60.16,51.43 59.53,52.06 44.29,52.06 43.02,53.34 43.02,61.59 41.75,62.86 37.3,62.86 J1.21
PA12
  Top 0.406: JP5.4 62.7,52.06 61.43,53.34 45.55,53.34 44.29,54.6 44.29,64.13 41.75,66.67 J1.20
PA13
  Top 0.406: JP5.10 70.32,50.16 65.88,54.6 47.46,54.6 46.19,55.88 46.19,66.67 41.11,71.75 J1.16
PA14
  Top 0.406: JP5.12 72.86,50.16 66.51,56.51 49.37,56.51 48.1,57.78 48.1,66.67 41.75,73.02 37.3,73.02 J1.15
PA15  (via drill 0.61)
  Top 0.254: v30.32,80.01 32.86,82.55 32.86,85.72 35.4,88.26 37.3,88.26 37.3,90.17 37.94,90.8 46.83,90.8 47.46,90.17 v47.46,76.2
  Bottom 0.254: v30.32,80.01 11.9,80.01 10.63,81.28 PROC.7 | v47.46,76.2 45.55,74.29 J1.14
PA16  (via drill 0.61)
  Top 0.254: v30.32,74.29 25.23,69.21 CAM.12
  Bottom 0.254: v30.32,74.29 J1.13
PA17  (via drill 0.61)
  Top 0.254: v28.41,71.11 35.4,78.1 37.3,78.1 37.3,82.55 38.57,83.82 J1.6
  Bottom 0.254: CAM.13 v28.41,71.11
PA18  (via drill 0.61)
  Top 0.254: v31.59,82.55 28.41,79.37 28.41,73.66 CAM.14
  Bottom 0.254: v31.59,82.55 32.22,81.91 J1.7
PA19
  Bottom 0.254: CAM.15 25.87,76.2 26.5,76.83 31.59,76.83 34.12,79.37 J1.9
PA20  (via drill 0.61)
  Top 0.254: v30.95,78.73 v32.86,76.83
  Bottom 0.254: v32.86,76.83 34.12,75.56 36.67,75.56 37.94,76.83 J1.12 | CAM.16 v30.95,78.73
PA21
  Bottom 0.254: CAM.17 34.76,81.28 35.4,80.64 36.67,80.64 37.94,81.91 J1.8
PA22
  Bottom 0.254: CAM.18 34.76,83.82 35.4,83.18 39.21,83.18 39.84,82.55 39.84,80.01 38.57,80.01 J1.10
PA23
  Bottom 0.254: CAM.19 25.87,86.36 26.5,85.72 39.21,85.72 40.48,84.45 40.48,78.1 37.94,78.1 36.67,76.83 J1.11
PA24
  Bottom 0.254: CAM.11 32.22,66.03 35.4,69.21 J1.17
PA25
  Bottom 0.254: CAM.7 23.33,73.66 24.6,72.39 32.86,72.39 34.76,70.48 36.67,70.48 37.94,69.21 J1.18
PA26  (via drill 0.61)
  Top 0.254: v21.43,64.77 21.43,81.91 22.7,83.18 CAM.3
  Bottom 0.254: v21.43,64.77 33.49,64.77 35.4,66.67 J1.19
PA27  (via drill 0.61)
  Top 0.254: v21.43,92.7 21.43,88.26 22.7,86.99 CAM.2 | v48.1,92.07 52.54,87.62 v52.54,74.29
  Bottom 0.254: v21.43,92.7 22.06,92.07 v48.1,92.07 | v52.54,74.29 53.81,73.02 64.61,73.02 65.88,71.75 J2.16
PA28  (via drill 0.6, 0.61)
  Top 0.254: PROC.13 9.36,73.66 8.09,72.39 8.09,69.21 14.44,69.21 17.62,66.03 17.62,63.49 16.98,62.86 R21.2 | v51.91,66.67 51.27,66.03 v51.27,62.23 | v44.92,48.25 v47.46,50.79 | v37.3,53.34 v39.84,53.34 | v15.71,55.24 32.86,55.24 33.49,55.88 v34.76,55.88
  Bottom 0.254: v51.91,66.67 56.35,66.67 61.43,71.75 J2.15 | v51.27,62.23 47.46,58.41 v47.46,50.79 | v39.84,53.34 v44.92,48.25 | PROC.13 8.09,73.66 4.92,70.48 4.92,55.24 v15.71,55.24 | v34.76,55.88 v37.3,53.34
PA29  (via drill 0.61)
  Top 0.254: v26.5,74.93 27.14,75.56 27.14,86.36 v34.12,93.34 | v50,91.44 53.81,87.62 53.81,65.4 56.35,62.86 65.24,62.86 65.24,72.39 63.97,73.66 J2.13 | PROC.11 9.36,76.2 4.28,71.11 4.28,57.14 17.62,57.14 17.62,58.41 16.98,59.05 R13.2
  Bottom 0.254: v26.5,74.93 11.9,74.93 10.63,76.2 PROC.11 | v34.12,93.34 48.1,93.34 v50,91.44
PA30  (via drill 0.61)
  Top 0.254: v16.98,78.73 16.98,80.01 11.9,80.01 10.63,78.73 PROC.9 | v32.86,79.37 33.49,80.01 33.49,83.82 35.4,85.72 44.92,85.72 v44.92,80.01
  Bottom 0.254: v16.98,78.73 18.25,77.47 30.95,77.47 v32.86,79.37 | v44.92,80.01 49.37,75.56 54.45,75.56 55.08,74.93 61.43,74.93 62.07,75.56 64.61,75.56 65.88,76.83 J2.12
PA31  (via drill 0.61)
  Top 0.254: v16.98,69.84 11.9,69.84 10.63,71.11 PROC.15 | v30.32,69.84 v33.49,73.02
  Bottom 0.254: v16.98,69.84 v30.32,69.84 | v33.49,73.02 36.67,73.02 37.3,73.66 37.3,74.93 37.94,75.56 39.21,75.56 51.91,88.26 64.61,88.26 65.88,86.99 J2.4
PC_CTS
  Top 0.305: RS232.7 111.59,65.4 111.59,61.59 114.13,59.05 114.13,57.14 U$10.8
PC_RTS
  Top 0.305: RS232.8 114.13,65.4 114.13,62.23 115.41,62.23 116.04,61.59 116.04,60.32 115.41,59.68 115.41,56.51 114.77,55.88 U$10.7
PC_RX  (via drill 0.6)
  Top 0.305: RS232.3 112.86,62.23 v114.52,60.57 | v108.42,60.32 109.69,59.05 109.69,52.7 109.05,52.06 U$10.13 106.52,52.06
  Bottom 0.305: v114.52,60.57 114.26,60.32 v108.42,60.32
PC_TX
  Top 0.305: RS232.2 110.33,52.06 109.05,50.79 U$10.14 106.52,50.79
PWM1  (via drill 0.6)
  Top 0.406: v60.16,33.02 55.08,33.02 53.81,34.28 53.81,40.63 JP5.1
  Bottom 0.406: LEFT.1 63.34,21.59 60.8,24.12 60.8,32.38 v60.16,33.02
PWM2
  Top 0.406: LEFT.9 58.26,39.37 62.7,43.81 JP5.3
PWM3  (via drill 0.6)
  Top 0.406: v69.69,42.54 69.69,44.45 70.32,45.08 JP5.9
  Bottom 0.406: RIGHT.1 84.29,21.59 86.19,22.86 86.19,38.73 83.66,41.27 83.66,42.54 v69.69,42.54
PWM4
  Top 0.406: RIGHT.9 74.13,40.63 72.86,41.91 JP5.11
RTS_3V
  Top 0.305: JP6.1 96.35,57.14 102.7,57.14 103.97,55.88 U$10.10 107.15,55.88
RXD_3V
  Top 0.305: JP6.7 96.35,52.06 101.44,52.06 102.7,53.34 104.61,53.34 | 104.61,53.34 103.97,53.34 | 104.61,53.34 U$10.12
TCK
  Top 0.305: R2.1 110.19,78.23 107.78,80.64 104.61,80.64 ZLACZE_JTAG.9
  Bottom 0.305: ZLACZE_JTAG.9 103.34,84.45 91.27,84.45 90,85.72 65.24,85.72 J2.3
TDI  (via drill 0.6)
  Top 0.305: ZLACZE_JTAG.5 98.77,82.42 R4.1 98.89,77.47 98.89,76.83 v98.26,76.2
  Bottom 0.305: J2.20 69.69,66.67 71.59,68.58 91.91,68.58 91.91,74.29 96.35,74.29 v98.26,76.2
TDO  (via drill 0.6)
  Top 0.305: R1.1 118.71,78.61 117.31,80.01 111.59,80.01 v109.69,81.91 ZLACZE_JTAG.13
  Bottom 0.305: J2.7 65.24,80.64 67.78,80.64 68.41,81.28 68.41,82.55 70.32,84.45 88.73,84.45 93.81,79.37 108.42,79.37 109.69,80.64 v109.69,81.91
TMS
  Top 0.305: R3.1 107.28,79.24 106.52,80.01 102.7,80.01 102.07,80.64 ZLACZE_JTAG.7
  Bottom 0.305: ZLACZE_JTAG.7 102.07,81.28 101.44,80.64 93.81,80.64 89.37,85.09 69.69,85.09 67.78,83.18 65.24,83.18 J2.5
TST
  Top 0.305: TST.1 70.95,64.13 68.41,61.59 J2.24
TXD_3V
  Top 0.305: JP6.4 102.07,55.88 103.34,54.6 U$10.11
UDP_PUP  (via drill 0.61)
  Top 0.254: v22.7,93.34 22.7,93.98 16.98,93.98 12.54,89.53 PROC.2 | v51.27,91.44 55.08,87.62 v55.08,71.11 | v52.54,69.21 53.18,68.58 53.18,64.77 56.35,61.59 J2.23
  Bottom 0.254: v22.7,93.34 32.86,93.34 34.12,94.61 48.1,94.61 v51.27,91.44 | v55.08,71.11 53.18,69.21 v52.54,69.21
USBDN  (via drill 0.6)
  Top 0.254: v66.51,94.61 64.61,94.61 63.97,95.25 32.86,95.25 26.5,88.9 26.5,87.62 24.6,87.62 23.96,88.26 23.96,94.61 16.34,94.61 11.27,89.53 11.27,88.26 12.54,86.99 PROC.4
  Bottom 0.305: v66.51,94.61 J2.2
USBDP  (via drill 0.61)
  Top 0.254: v28.41,82.55 34.12,88.26 v34.12,89.53
  Bottom 0.254: v28.41,82.55 14.44,82.55 13.17,83.82 PROC.6 | v34.12,89.53 35.4,90.8 46.83,90.8 48.1,89.53 J2.1
VBATT*0.33
  Top 0.813: JP3.2 28.28,28.44 R16.2 R15.1 25.23,24.76
VCC  (via drill 0.6)
  Top 1.016: R14.2 25.23,15.87 24.6,15.23 v24.6,14.6 ZASILANIE.2
  Bottom 1.016: JP1.2 7.46,19.05 8.72,20.31 13.8,20.31 15.07,21.59 22.06,21.59 22.06,17.14 v24.6,14.6 29.04,14.6 29.04,23.49 34.76,23.49 34.76,34.28 30.95,38.09 30.95,43.17 | 30.95,43.17 30.95,45.08 JP7.2 | D2.A 37.94,41.27 36.03,43.17 30.95,43.17
(copper drawn outside any net)
  shapes: Top area x3

## Text on the board
OPISY_TOP: WFiIS AGH, CZERWIEC 2009 | OPIEKUN: dr hab. inz. MAREK IDZIK | JTAGSEL | 1 | 20 | 1 | 2 | 1 | 2 | DARK EXPLORER | AD5 | UDPPUP | GND | 5V | 20 | JTAG | 2 | AD6 | USBDN | PA27 | PA23 | ARM7 | AD7 | USBDP | PA26 | PA22 | M A I N B O A R D | PA15 | DFCS | GND | PA21 | AT91SAM7S | 1 | 19 | PA30 | PCLK | PA4 | PA20 | RESET | PA29 | 5V | PA3 | PA19 | BY PAWEL KMAK | PA28 | 3.3V | PA25 | PA18 | PA31 | GND | PCLK | PA17 | RS232 | 6 | 10 | GND | PA16 | uC RXD | uC TXD | PROC | TST | GND | PA24 | PA28 | 10 | 11 | CAM | 1 | 5 | PA29 | JP9 | ERASE | RTS | CTS | MAX3232CSE | GND | 25 | 26 | 25 | 26 | SIG | 5V | T1 | PA2 | J1 | PA11 | PA12 | J2 | PA13 | PA14 | PA10 | BT TX | TXD | PA7 | PA8 | PA9 | SERWO | PA5 | PA6 | T1 | D2 BYPASS | JP5 | RXD | BT RX | JP6 | 1 | 3 | 2 | PWM1 | PWM2 | IN1 | IN2 | PWM3 | PWM4 | IN3 | IN4 | BT1 | BT2 | D2 | + | JP7 | JP2 | PWR LED | C2 | MBI1801 | 3.3V | L293D | L293D | + | LM2575-5 | LM OUT | JP3 | + | L1 | VCC/3 | AD4 | JP4 | JP1 | PA1 | BTM222 | C1 | EN | + | PWR | PWR OUT | LED | SILNIKI | 5V | 7V | JP8 | VCC | GND | D1 | GND | GND | 5V | 5V | 3.3V | + | AN | CAT | M1 | M2 | M3 | M4 | ANTENA